# Allegro board v3.brd
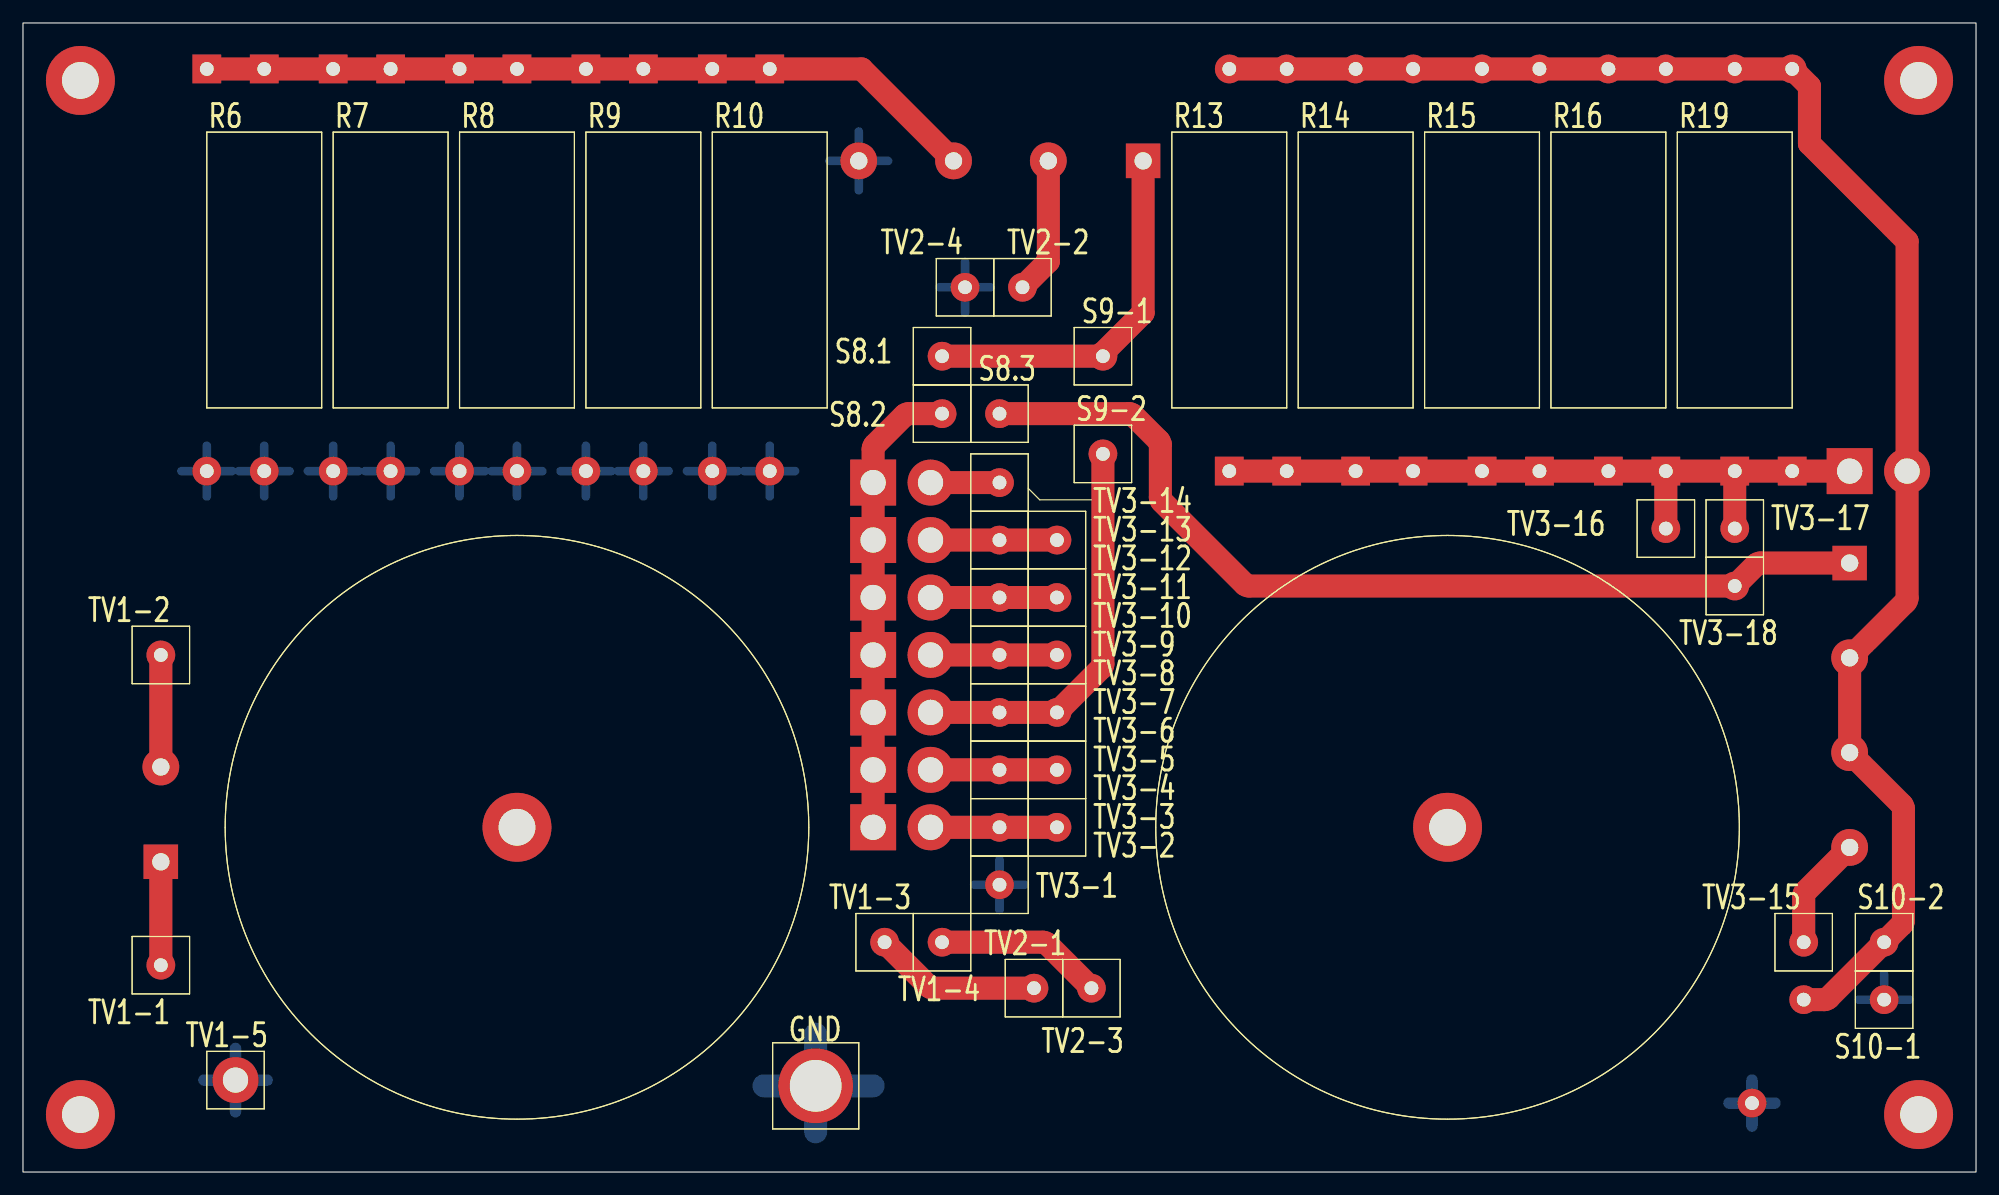
[diagram p0: board, top side]
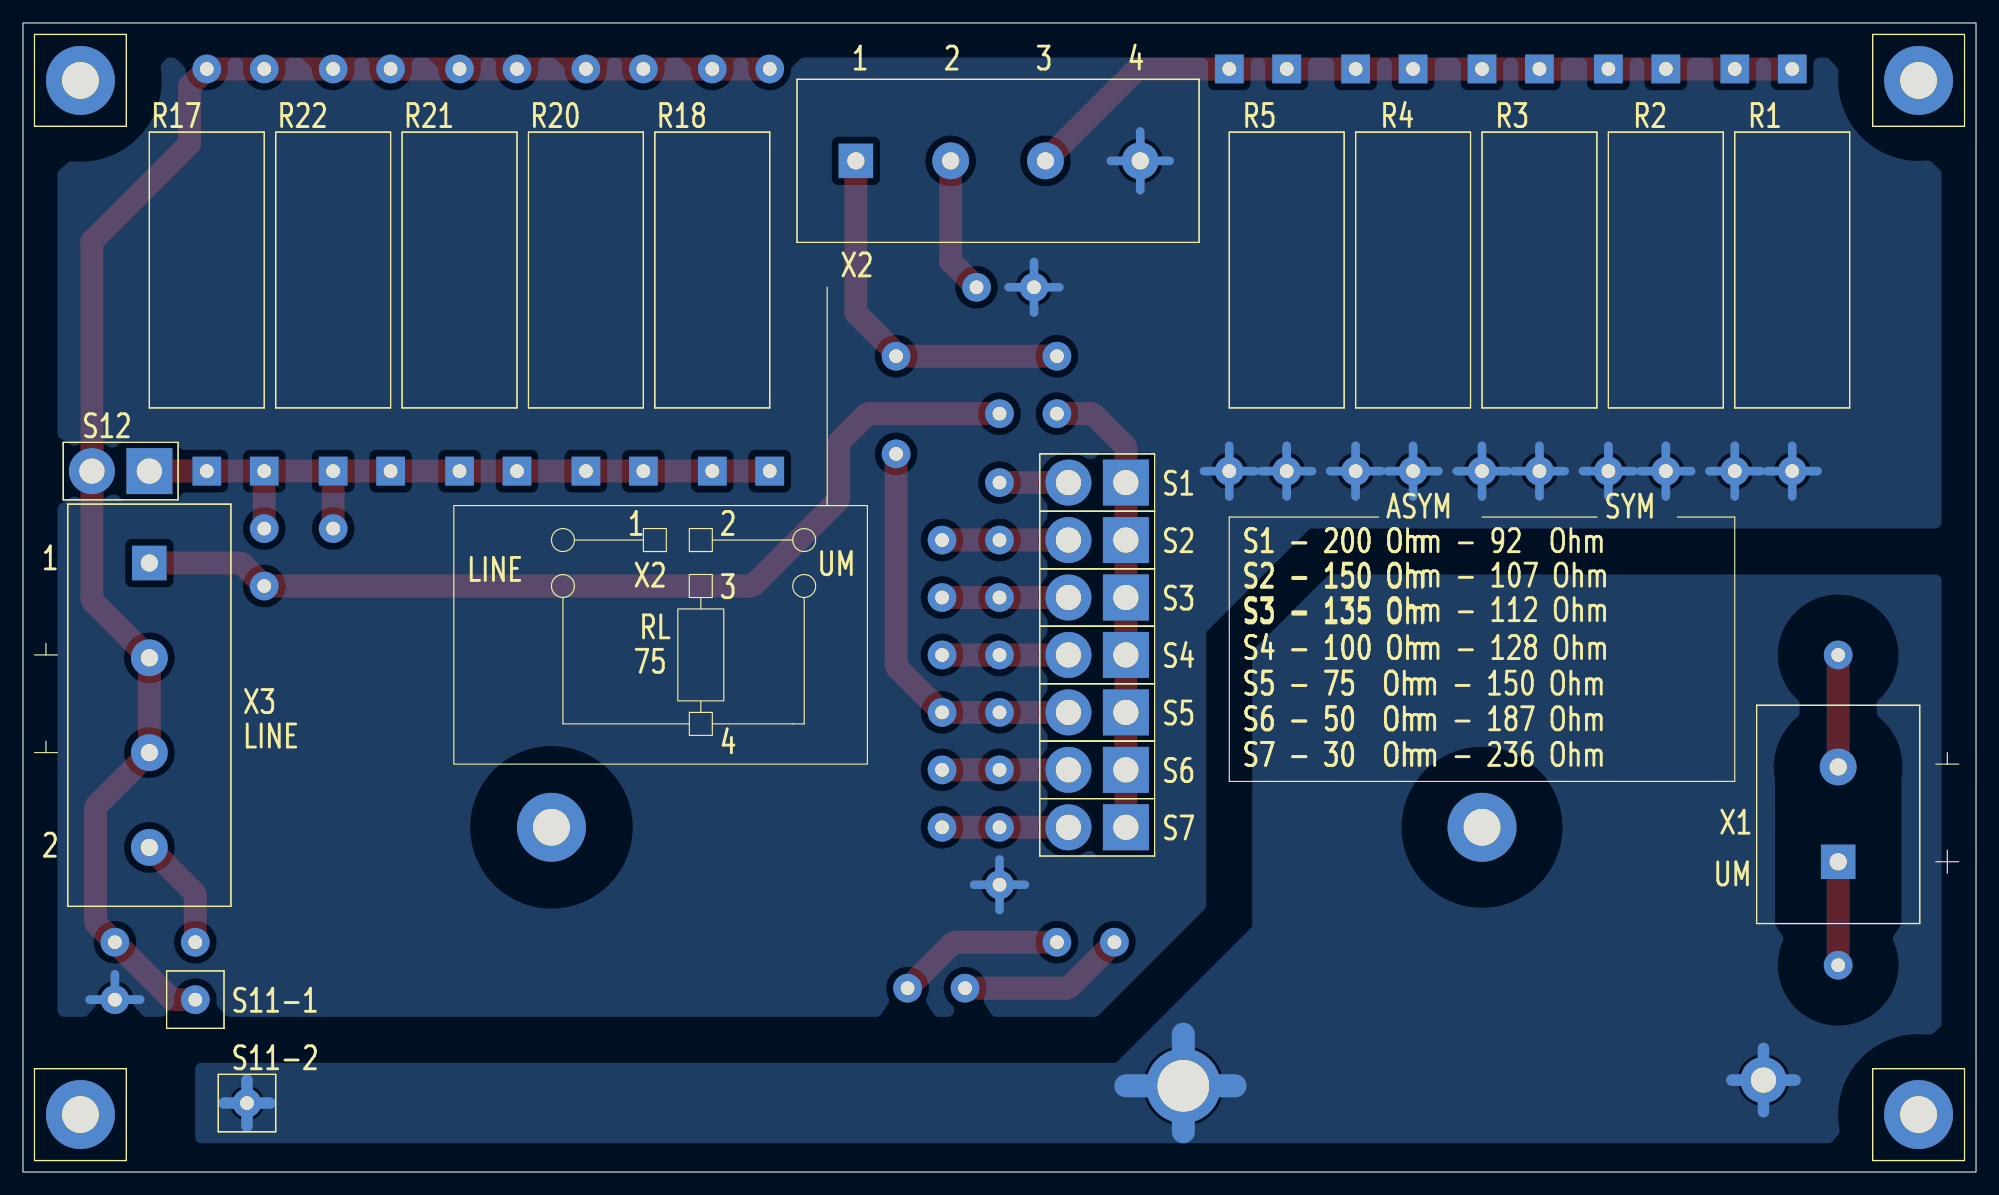
[diagram p1: board, bottom side, seen from below]

Outline 170 x 100 mm; copper layers: TOP, BOTTOM. Coordinates in mm from the lower left corner of the outline.
Outline path: rectangle 0,0 170,100

## Placement (name value [footprint] x y rotation side)
NOREF  -  [unnamed]  124 30 0 top
NOREF#2  -  [unnamed]  43 30 0 top
NOREF#3  -  [unnamed]  5 5 180 bottom
NOREF#4  -  [unnamed]  165 5 180 bottom
NOREF#5  -  [unnamed]  5 95 180 bottom
NOREF#6  -  [unnamed]  165 95 180 bottom
R1  750  [SQP_5W]  16 96 270 bottom
R2  750  [SQP_5W]  27 96 270 bottom
R3  750  [SQP_5W]  38 96 270 bottom
R4  750  [SQP_5W]  49 96 270 bottom
R5  750  [SQP_5W]  60 96 270 bottom
R6  750  [SQP_5W]  21 96 270 top
R7  750  [SQP_5W]  32 96 270 top
R8  750  [SQP_5W]  43 96 270 top
R9  750  [SQP_5W]  54 96 270 top
R10  750  [SQP_5W]  65 96 270 top
R13  750  [SQP_5W]  105 61 90 top
R14  750  [SQP_5W]  116 61 90 top
R15  750  [SQP_5W]  127 61 90 top
R16  750  [SQP_5W]  138 61 90 top
R17  750  [SQP_5W]  154 61 90 bottom
R18  750  [SQP_5W]  110 61 90 bottom
R19  750  [SQP_5W]  149 61 90 top
R20  750  [SQP_5W]  121 61 90 bottom
R21  750  [SQP_5W]  132 61 90 bottom
R22  750  [SQP_5W]  143 61 90 bottom
S1  jumper  [SOCKET_H3161_2]  74 60 270 bottom
S2  jumper  [SOCKET_H3161_2]  74 55 270 bottom
S3  jumper  [SOCKET_H3161_2]  74 50 270 bottom
S4  jumper  [SOCKET_H3161_2]  74 45 270 bottom
S5  jumper  [SOCKET_H3161_2]  74 40 270 bottom
S6  jumper  [SOCKET_H3161_2]  74 35 270 bottom
S7  jumper  [SOCKET_H3161_2]  74 30 270 bottom
S8.1  point  [P1_5MM]  80 71 0 top
S8.2  point  [P1_5MM]  80 66 0 top
S8.3  point  [P1_5MM]  85 66 0 top
S9-1  point  [P1_5MM]  94 71 0 top
S9-2  point  [P1_5MM]  94 62.5 0 top
S10-1  point  [P1_5MM]  162 15 0 top
S10-2  point  [P1_5MM]  162 20 0 top
S11-1  point  [P1_5MM]  155 15 180 bottom
S11-2  point  [P1_5MM]  150.5 6 180 bottom
S12  jumper  [SOCKET_H3161_2]  159 61 270 bottom
TV1-1  point  [P1_5MM]  12 18 0 top
TV1-2  point  [P1_5MM]  12 45 0 top
TV1-3  point  [P1_5MM]  75 20 0 top
TV1-4  point  [P1_5MM]  80 20 0 top
TV1-5  P2_2mm  [P2_2MM]  18.5 8 0 top
TV2-1  point  [P1_5MM]  88 16 0 top
TV2-2  point  [P1_5MM]  87 77 0 top
TV2-3  point  [P1_5MM]  93 16 0 top
TV2-4  point  [P1_5MM]  82 77 0 top
TV3-1  point  [P1_5MM]  85 25 0 top
TV3-2  point  [P1_5MM]  85 30 0 top
TV3-3  point  [P1_5MM]  90 30 0 top
TV3-4  point  [P1_5MM]  85 35 0 top
TV3-5  point  [P1_5MM]  90 35 0 top
TV3-6  point  [P1_5MM]  85 40 0 top
TV3-7  point  [P1_5MM]  90 40 0 top
TV3-8  point  [P1_5MM]  85 45 0 top
TV3-9  point  [P1_5MM]  90 45 0 top
TV3-10  point  [P1_5MM]  85 50 0 top
TV3-11  point  [P1_5MM]  90 50 0 top
TV3-12  point  [P1_5MM]  85 55 0 top
TV3-13  point  [P1_5MM]  90 55 0 top
TV3-14  point  [P1_5MM]  85 60 0 top
TV3-15  point  [P1_5MM]  155 20 0 top
TV3-16  point  [P1_5MM]  143 56 0 top
TV3-17  point  [P1_5MM]  149 56 0 top
TV3-18  point  [P1_5MM]  149 51 0 top
X1  DG35C-02P  [DG35C_02P]  12 27 0 bottom
X2  DG35C-04P  [DG35C_04P]  97.5 88 90 bottom
X3  DG35C-04P  [DG35C_04P]  159 53 180 bottom
X4  P4mm  [GND_CONN]  69 7.5 0 top

## Library data of the parts
R1-R10 R13-R22 = SQP500JB-750R
S1-S7 S12 = JUMPER_F
S8.1-S8.3 S9-1 S9-2 S10-1 S10-2 S11-1 S11-2 TV1-1-TV1-4 TV2-1-TV2-4 TV3-1-TV3-18 = P1_5mm
TV1-5 = P2_2mm
X1 = DG35C_02P
X2 X3 = DG35C_04P
X4 = P4_0mm

## Footprints (pads in the part's own frame, mm; a bottom-side part is the same pattern mirrored in y, then rotated)
DG35C_02P
  rect 3x3 hole 1.5: 1(0,0)
  round 3.2 hole 1.5: 2(0,-8.25)
DG35C_04P
  rect 3x3 hole 1.5: 1(0,0)
  round 3.2 hole 1.5: 2(0,-8.25) 3(0,-16.5) 4(0,-24.75)
GND_CONN
  round 6.5 hole 4.5: 1(0,0)
P1_5MM
  round 2.5 hole 1.2: 1(0,0)
P2_2MM
  round 4 hole 2.2: 1(0,0)
SOCKET_H3161_2
  rect 4x4 hole 2.2: 1(0,0)
  round 4 hole 2.2: 2(0,-5)
SQP_5W
  rect 2.5x2.5 hole 1.2: 1(0,0)
  round 2.5 hole 1.2: 2(35,0)
unnamed
  round 6 hole 3.2 unplated: (0,0)

## Nets
GND_EARTH: S11-2.1 TV1-5.1 X4.1
SIG+: S8.3.1 TV3-18.1 X3.1
SIG-: R1.2 R2.2 R3.2 R4.2 R5.2 R6.2 R7.2 R8.2 R9.2 R10.2 S10-1.1 TV2-4.1 TV3-1.1 X2.4
N46119: TV1-1.1 X1.1
N46131: TV1-2.1 X1.2
N46299: TV3-15.1 X3.4
N46307: R13.1 R14.1 R15.1 R16.1 R17.1 R18.1 R19.1 R20.1 R21.1 R22.1 S12.1 TV3-16.1 TV3-17.1
N46439: R13.2 R14.2 R15.2 R16.2 R17.2 R18.2 R19.2 R20.2 R21.2 R22.2 S10-2.1 S11-1.1 S12.2 X3.2 X3.3
N46583: TV1-4.1 TV2-3.1
N46587: TV1-3.1 TV2-1.1
N46607: R1.1 R2.1 R3.1 R4.1 R5.1 R6.1 R7.1 R8.1 R9.1 R10.1 X2.3
N46819: S6.2 TV3-4.1 TV3-5.1
N46831: S7.2 TV3-2.1 TV3-3.1
N46967: S5.2 S9-2.1 TV3-6.1 TV3-7.1
N46979: S4.2 TV3-8.1 TV3-9.1
N46991: S3.2 TV3-10.1 TV3-11.1
N47003: S2.2 TV3-12.1 TV3-13.1
N47091: S1.2 TV3-14.1
N47119: TV2-2.1 X2.2
N47541: S8.1.1 S9-1.1 X2.1
N57068: S1.1 S2.1 S3.1 S4.1 S5.1 S6.1 S7.1 S8.2.1

## Routing (per net, layer and track width the routed paths; a pad name or vN(x,y) marks a point on that pad's centre or on a via; arc(x,y) is an arc through that point)
GND_EARTH: length 37
  BOTTOM w1: TV1-5.1 18.5,10.75 ; TV1-5.1 15.75,8 ; TV1-5.1 21.25,8 ; TV1-5.1 18.5,5.25 ; 148.5,6 S11-2.1 ; S11-2.1 150.5,4 ; S11-2.1 150.5,8 ; S11-2.1 152.5,6
  BOTTOM w2: X4.1 64.5,7.5 ; X4.1 69,3.5 ; X4.1 74,7.5 ; X4.1 69,12
SIG+: length 83.9
  TOP w2: S8.3.1 96.29,66 arc(96.48,65.96) 96.65,65.85 98.85,63.65 arc(98.96,63.48) 99,63.29 99,58.71 arc(99.04,58.52) 99.15,58.35 106.35,51.15 arc(106.52,51.04) 106.71,51 TV3-18.1 150.85,52.85 arc(151.02,52.96) 151.21,53 X3.1
SIG-: length 122.5
  BOTTOM w0.75: TV2-4.1 84.2,77 ; TV2-4.1 79.8,77 ; TV2-4.1 82,79.2 ; TV2-4.1 82,74.8 ; R7.2 34.2,61 ; R7.2 32,63.2 ; R7.2 29.8,61 ; R7.2 32,58.8 ; 57.8,61 R5.2 ; R5.2 60,58.8 ; R5.2 60,63.2 ; R5.2 62.2,61 ; 35.8,61 R3.2 ; R3.2 40.2,61 ; R3.2 38,63.2 ; R3.2 38,58.8 ; 43,58.8 R8.2 ; R8.2 43,63.2 ; R8.2 40.8,61 ; R8.2 45.2,61 ; R1.2 18.2,61 ; R1.2 16,63.2 ; R1.2 13.8,61 ; R1.2 16,58.8 ; R10.2 67.2,61 ; R10.2 62.8,61 ; R10.2 65,63.2 ; R10.2 65,58.8 ; R6.2 23.2,61 ; R6.2 21,58.8 ; R6.2 21,63.2 ; R6.2 18.8,61 ; 85,22.8 TV3-1.1 ; TV3-1.1 82.8,25 ; TV3-1.1 85,27.2 ; TV3-1.1 87.2,25 ; 24.8,61 R2.2 ; R2.2 29.2,61 ; R2.2 27,63.2 ; R2.2 27,58.8 ; S10-1.1 164.2,15 ; S10-1.1 162,17.2 ; S10-1.1 159.8,15 ; X2.4 72.75,90.55 ; X2.4 72.75,85.45 ; X2.4 70.2,88 ; X2.4 75.3,88 ; R9.2 56.2,61 ; R9.2 54,63.2 ; R9.2 54,58.8 ; R9.2 51.8,61 ; 46.8,61 R4.2 ; R4.2 49,63.2 ; R4.2 49,58.8 ; R4.2 51.2,61
N46119: length 8.5
  TOP w2: X1.1 12,18.5
N46131: length 9.8
  TOP w2: X1.2 TV1-2.1
N46299: length 9.9
  TOP w2: TV3-15.1 155,24.04 arc(155.04,24.23) 155.15,24.4 X3.4
N46307: length 64
  TOP w2: R22.1 R16.1 R21.1 R15.1 R20.1 R14.1 R18.1 R13.1 ; R22.1 TV3-16.1 ; R22.1 R19.1 ; S12.1 R17.1 R19.1 ; TV3-17.1 R19.1
N46439: length 142.8
  TOP w2: S11-1.1 156.79,15 arc(156.98,15.04) 157.15,15.15 S10-2.1 163.54,21.54 arc(163.64,21.7) 163.68,21.89 163.68,31.61 arc(163.64,31.8) 163.54,31.96 X3.3 X3.2 163.85,49.6 arc(163.96,49.77) 164,49.96 S12.2 164,81 155.5,89.5 155.5,94.5 R17.2 R19.2 R22.2 R16.2 R21.2 R15.2 R20.2 R14.2 R18.2 R13.2
N46583: length 14.6
  TOP w2: TV2-3.1 89.15,19.85 arc(88.98,19.96) 88.79,20 TV1-4.1
N46587: length 14.6
  TOP w2: TV1-3.1 78.85,16.15 arc(79.02,16.04) 79.21,16 TV2-1.1
N46607: length 68.3
  TOP w2: R1.1 R6.1 R2.1 R7.1 R3.1 R8.1 R4.1 R9.1 R5.1 R10.1 73,96 X2.3
N46819: length 11
  TOP w2: TV3-5.1 TV3-4.1 S6.2
N46831: length 11
  TOP w2: S7.2 TV3-2.1 TV3-3.1
N46967: length 35.1
  TOP w2: S9-2.1 94,44.21 arc(93.96,44.02) 93.85,43.85 TV3-7.1 TV3-6.1 S5.2
N46979: length 11
  TOP w2: S4.2 TV3-8.1 TV3-9.1
N46991: length 11
  TOP w2: S3.2 TV3-10.1 TV3-11.1
N47003: length 11
  TOP w2: S2.2 TV3-12.1 TV3-13.1
N47091: length 6
  TOP w2: TV3-14.1 S1.2
N47119: length 11.9
  TOP w2: TV2-2.1 89.25,79.25 X2.2
N47541: length 32.6
  TOP w2: X2.1 97.5,74.77 93.73,71 ; 93.73,71 S8.1.1 ; 93.73,71 S9-1.1
N57068: length 40.3
  TOP w2: S8.2.1 77.08,66 arc(76.89,65.96) 76.73,65.85 74.15,63.27 arc(74.04,63.11) 74,62.92 S1.1 S2.1 S3.1 S4.1 S5.1 S6.1 S7.1

## Copper pours and planes (outline as drawn; the poured copper is in the pictures)
GND_EARTH on BOTTOM: 3,56 58,56 67,47 67,23 76.5,13.5 155,13.5 155,2.5 3,2.5
SIG- on BOTTOM: 167,13.5 76.5,13.5 67,23 67,47 57.97,56 3,56 3,88.29 9.95,90.05 11.71,97 158.22,97 160,90 167,88.22 ; 1 cut-out

## Text on the board
Ref Des/Silkscreen Bottom: UM | SYM | ASYM | S1 - 200 Ohm - 92  Ohm | S1 - 200 Om | S2 - 150 Ohm - 107 Ohm | S2 - 150 Om | S3 - 135 Ohm - 112 Ohm | S3 - 135 Om | S4 - 100 Ohm - 128 Ohm | S4 - 100 Om | S5 - 75  Ohm - 150 Ohm | S5 - 75  Om | S6 - 50  Ohm - 187 Ohm | S6 - 50  Om | S7 - 30  Ohm - 236 Ohm | S7 - 30  Om | 4 | 3 | 2 | 1 | RL | X2 | 75 | LINE
Ref Des/Assembly Top: TV1 | TV2 | TV3
NCLEGEND-BL-1-2: FIGURE | SIZE | 1.2 | 1.5 | 2.2 | 4.5 | 3.2 | BY LAYER: TOP to BOTTOM | ALL UNITS ARE IN MILLIMETERS | PLATED | NON-PLATED | QTY | 75 | 10 | 17 | 1 | 6
